# EAGLE board ConnectorBoard (EAGLE 5.11)
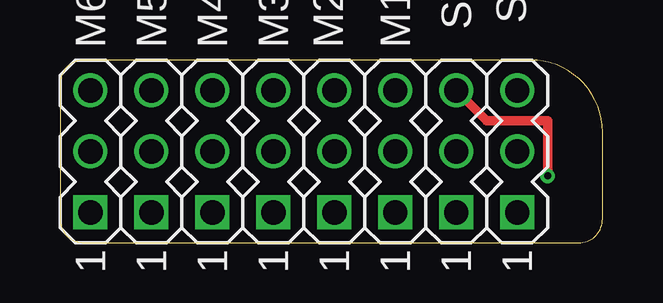
[diagram p0: board, top side]
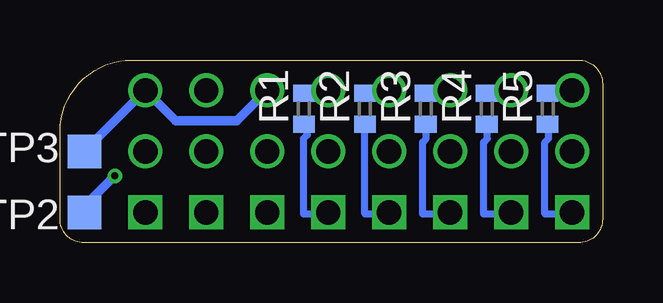
[diagram p1: board, bottom side, seen from below]

Size 22.61 x 7.62 mm. Coordinates in mm from the lower left corner, seen from the top.
Outline: 21.61,0 arc90 22.61,1 22.61,4.62 arc90 19.61,7.62 1,7.62 arc90 0,6.62 0,1 arc90 1,0 21.61,0
Copper layers (1*16): Top 0.035mm / dielectric 1.5mm / Bottom 0.035mm
Design rules "Fischer-LP_BGA *": minimum track width 0.3mm, minimum drill 0.3mm, track to track 0.15mm, track to pad 0.15mm, pad to pad 0.15mm, via to via 0.15mm, smd to smd 0mil, copper to edge 0.2mm, drill to drill 0.3mm, minimum pad ring 0.2mm, minimum via ring 0.15mm, stop-mask expansion 0.05mm, vias tented up to drill 0.5mm, thermal gap 0.15mm
Net classes: 1 pwr: width 0.4 mm, clearance 0.3 mm

## Footprints (pad centres in the part's own frame; a part is rotated, then mirrored left to right if it is on the bottom)
MA03-1 = drill 1.016 square: 1 -2.54,0 | drill 1.016 round: 2 0,0; 3 2.54,0
R0402 = smd 0.7 x 0.9: 1 -0.65,0; 2 0.65,0
TP14SQ = smd 1.4 x 1.4: TP 0,0

## Placement (x,y rotation side)
M1  [MA03-1]  13.97,3.81 90 top
M2  [MA03-1]  11.43,3.81 90 top
M3  [MA03-1]  8.89,3.81 90 top
M4  [MA03-1]  6.35,3.81 90 top
M5  [MA03-1]  3.81,3.81 90 top
M6  [MA03-1]  1.27,3.81 90 top
R1  [R0402]  12.45,5.59 90 bottom
R2  [R0402]  9.91,5.59 90 bottom
R3  [R0402]  7.37,5.59 90 bottom
R4  [R0402]  4.83,5.59 90 bottom
R5  [R0402]  2.29,5.59 90 bottom
SV7  [MA03-1]  16.51,3.81 90 top
SV8  [MA03-1]  19.05,3.81 90 top
TP2  TPSQTP14SQ  [TP14SQ]  21.59,1.27 0 bottom
TP3  TPSQTP14SQ  [TP14SQ]  21.59,3.81 0 bottom

## Library data of the parts
M1-M6 SV7 SV8 = Fabian
R1-R5 = rcl
TP2 TP3 = testpad

## Nets
GND [pwr]: M1.3 SV8.3 TP3.TP
N$1 [pwr]: M3.3 R2.2
N$2: M2.3 R1.2
N$3: M2.1 R1.1
N$4: M3.1 R2.1
N$5: M4.3 R3.2
N$6: M4.1 R3.1
N$7: M5.3 R4.2
N$8: M5.1 R4.1
N$9: SV8.1
N$10: M6.3 R5.2
N$11: M6.1 R5.1
N$12 [pwr]: SV7.3 TP2.TP
N$13: SV8.2
N$14: SV7.2
N$15: SV7.1

## Tracks (layer width: path | path; a pad name or v marks a point on that pad's centre or on a via)
GND
  Bottom 0.4: 21.45,3.9 TP3.TP SV8.3 | SV8.3 19.05,6.3 | M1.3 15.24,5.08 17.78,5.08 SV8.3
N$1
  Bottom 0.4: R2.2 9.9,6.3 9,6.3 M3.3
N$2
  Bottom 0.3: R1.2 12.3,6.3 11.55,6.3 M2.3
N$3
  Bottom 0.3: R1.1 12.3,4.8 12.3,4.5 12.45,4.35 12.45,1.2 11.55,1.2 M2.1
N$4
  Bottom 0.3: R2.1 9.9,4.8 9.9,1.2 9,1.2 M3.1
N$5
  Bottom 0.3: R3.2 7.35,6.3 6.45,6.3 M4.3
N$6
  Bottom 0.3: R3.1 7.35,4.8 7.35,4.35 7.5,4.2 7.5,1.2 6.45,1.2 M4.1
N$7
  Bottom 0.3: R4.2 4.8,6.3 3.9,6.3 M5.3
N$8
  Bottom 0.3: R4.1 4.8,4.8 4.8,4.35 4.95,4.2 4.95,1.2 3.9,1.2 M5.1
N$10
  Bottom 0.3: R5.2 2.25,6.3 1.35,6.3 M6.3
N$11
  Bottom 0.3: R5.1 2.25,4.8 2.25,4.35 2.4,4.2 2.4,1.2 1.35,1.2 M6.1
N$12  (via drill 0.3)
  Top 0.4: SV7.3 17.78,5.08 20.32,5.08 v20.32,2.79
  Bottom 0.4: v20.32,2.79 21.59,1.52 TP2.TP

## Text on the board
Document: gnd | s2 | gnd | plus | s3 | plus | sig | s4 | s1